# Altium PCB NaiS6202HD_0.7.PcbDoc (part 2 of 2)
Units mm, origin at the board's own origin, x right, y up, seen from the top; angles counter-clockwise.
Board outline 60 x 38 mm, 4 copper layers (Top, INT1, GND, Bottom), stack 0.965 mm thick; 148 components, 224 nets, 688 pads, 333 vias.
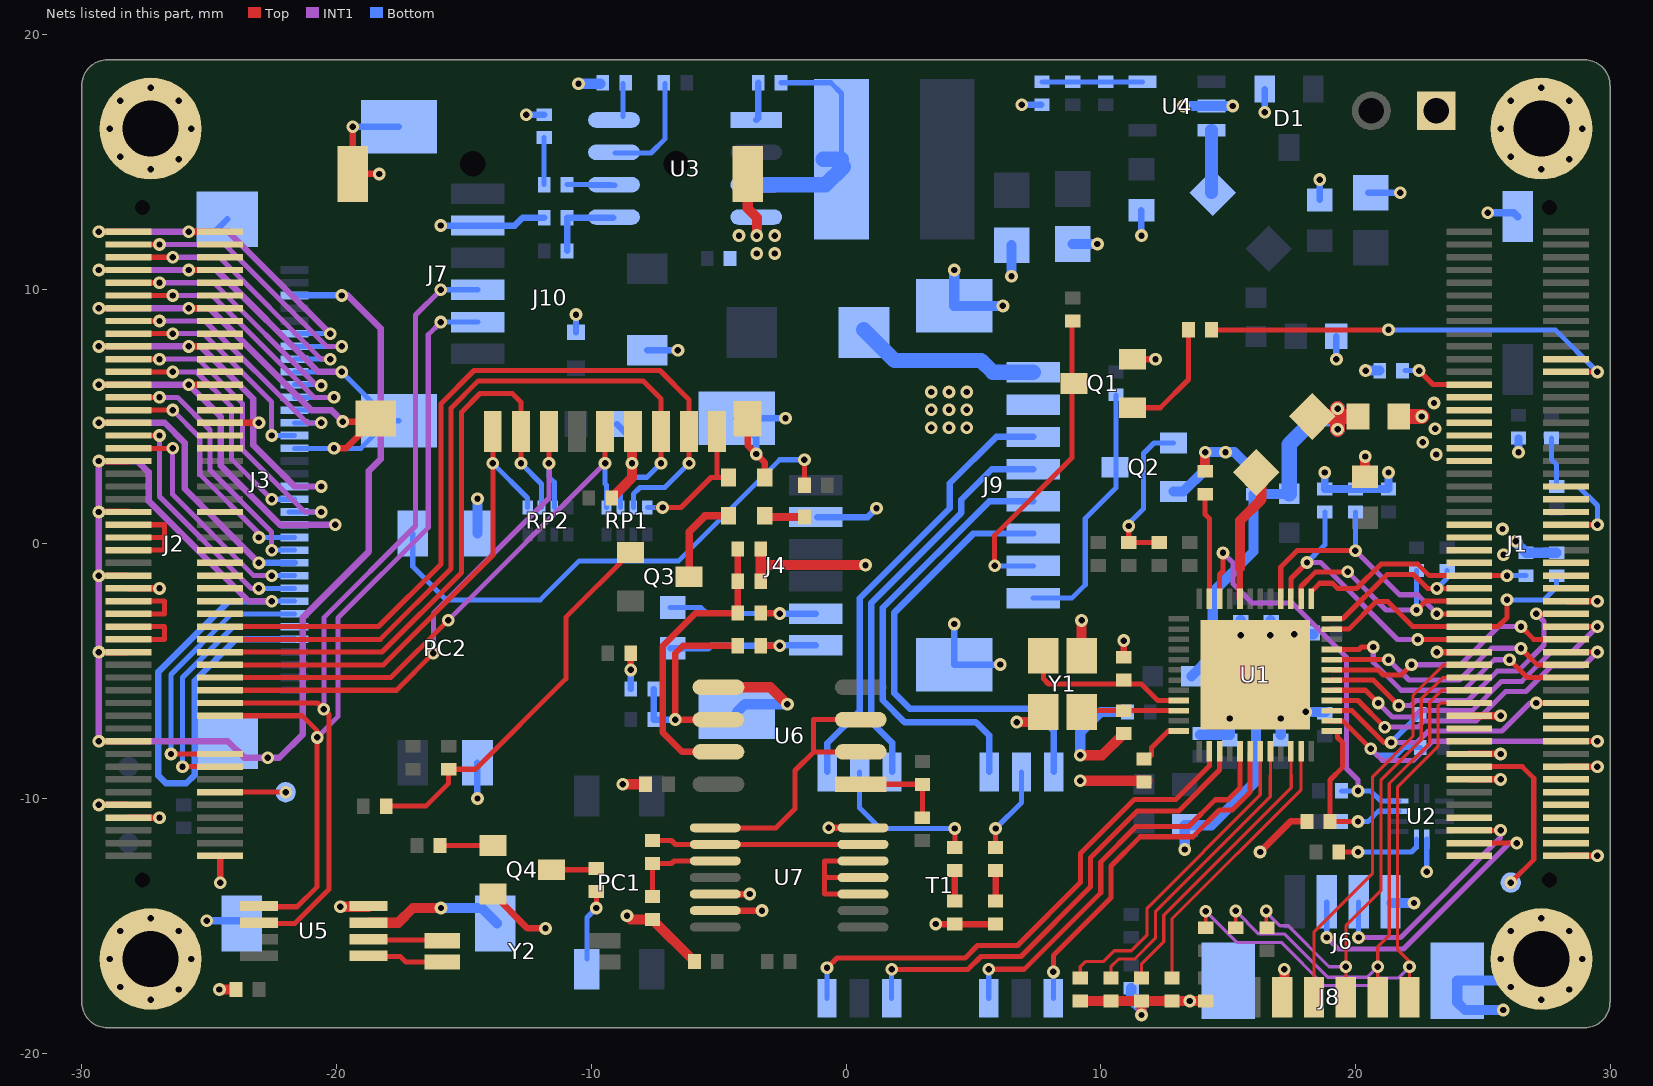
[diagram p4: the nets of this part, all layers, seen from the top]

## Via types
v1: diameter 0.5, hole 0.25, Top to Bottom, tented both sides, 189 vias
v2: diameter 0.5, hole 0.25, Top to Bottom, 144 vias

## Nets (pads, with @x,y where several pads share a name; then routed paths per layer and width w, separated by ;. In a path a pad name is that pad's centre, name@x,y a point inside that pad or via, vN(x,y) a via of type N, cw(c..) or ccw(c..) an arc to the next point about the centre after c; other vN are vias at no path point) (continued)
GND: BAT1.2 BC1.2 BC2.2 BC3.2 BC4.2 BC5.2 BC6.2 BC7.2 BC8.2 BC9.2 BC10.2 BC11.2 BC12.2 BC13.2 BC14.2 BC15.2 BC16.1 BC17.1 BC18.1 BC19.1 BC20.1 BC21.1 C1.1 C2.2 C3.1 C4.1 C5.2 C6.2 C7.2 C8.2 C9.2 C10.2 C11.2 C12.2 C14.2 C15.2 C16.2 C17.2 C18.2 C21.2 C22.2 C23.2 C24.1 C25.1 C26.1 D1.1 J1.2 J1.13 J1.16 J1.17 J1.23 J1.33 J1.42 J1.47 J1.49 J1.51 J1.53 J1.63 J1.65 J1.67 J1.69 J1.71 J1.73 J2.1 J2.8 J2.10 J2.20 J2.34 J2.44 J2.46 J2.56 J2.64 J2.69 J2.70 J2.75 J2.76 J2.81 J2.82 J2.87 J2.88 J2.93 J2.94 J2.99 J2.100 J3.5 J3.8 J3.11 J3.14 J3.17 J3.20 J3.23 J3.26 J3.29 J3.32 J3.M1 J3.M2 J4.2 J4.M1 J4.M2 J5.1 J6.4 J6.5 J6.6 J7.2 J7.M1 J7.M2 J8.2 J9.2 J9.9 J9.10 J10.6 J10.9 J10.10 J10.11 J10.12 MH1.1 MH2.1 MH3.1 MH4.1 PC2.2 PC2.3 Q1.2 Q2.2 Q4.2 R14.1 R16.1 R17.1 R18.1 R19.1 R22.1 R32.1 R33.1 R35.1 R50.1 SW1.2 TVS1.2 TVS2.2 U1.M1 U2.7 U3.4 U4.2 U5.4 U6.5 U7.7 U7.12 U7.13 Y1.2 Y1.4 | length 329
  Top w0.254: v1(-29.331,-10.25) J2.10@-28.17,-10.25 ; v1(-29.331,-7.75) J2.20@-28.17,-7.75 ; v1(-29.331,-4.25) J2.34@-28.17,-4.25 ; v1(-29.331,-1.25) J2.46@-28.17,-1.25 ; v1(-29.331,1.25) J2.56@-28.17,1.25 ; v1(-29.331,3.25) J2.64@-28.17,3.25 ; v1(-29.331,4.75) J2.70@-28.17,4.75 ; v1(-29.331,6.25) J2.76@-28.17,6.25 ; v1(-29.331,7.75) J2.82@-28.17,7.75 ; v1(-29.331,9.25) J2.88@-28.17,9.25 ; v1(-29.331,10.75) J2.94@-28.17,10.75 ; v1(-29.331,12.25) J2.100@-28.17,12.25 ; J2.8@-28.17,-10.75 v1(-26.95,-10.75) ; J2.44@-28.17,-1.75 v2(-26.95,-1.75) ; v1(-25.8,6.25) J2.75@-24.57,6.25 ; v2(-25.8,7.75) J2.81@-24.57,7.75 ; v1(-25.8,9.25) J2.87@-24.57,9.25 ; v2(-25.8,10.75) J2.93@-24.57,10.75 ; v1(-25.8,12.25) J2.99@-24.57,12.25 ; v1(-24.57,-13.305) J2.1@-24.57,-12.25 ; J2.69@-24.57,4.75 v2(-23.05,4.75) ; v1(-20.1,3.75) -19.632,3.75 J10.10@-18.583,4.799 ; v2(-19.753,4.799) J10.10@-18.583,4.799 ; J10.12@-19.37,14.527 v2(-19.37,16.37) ; J10.12@-19.363,14.52 v2(-18.32,14.52) ; J10.10@-18.462,4.92 J10.10@-18.583,4.799 ; Q4.2@-13.854,-13.749 -12.503,-15.1 v2(-11.8,-15.1) ; v2(-8.45,-4.95) BC20.1@-8.45,-4.3 ; U7.13@-5.132,-14.4 v2(-3.3,-14.4) ; U7.12@-5.132,-13.75 v2(-3.782,-13.75) ; J10.9@-3.86,4.911 -3.86,3.86 v2(-3.525,3.525) -3.19,3.19 TVS2.2@-3.19,2.6 ; v2(-0.682,-11.15) U7.7@0.668,-11.15 ; v2(3.527,-14.927) C12.2@4.273,-14.927 C11.2@5.873,-14.927 ; C3.1@10.9,-4.45 v2(10.9,-3.8) ; Q1.2@11.246,7.249 v2(12.149,7.249) ; v2(16.256,-12.098) 17.454,-10.9 C9.2@18.1,-10.9 ; v1(23.2,-4.25) J1.33@24.47,-4.25 ; J1.13@24.47,-9.25 v1(25.7,-9.25) ; J1.17@24.47,-8.25 v1(25.7,-8.25) ; J1.2@28.27,-12.25 v1(29.5,-12.25) ; J1.16@28.27,-8.75 v1(29.5,-8.75) ; J1.42@28.3,-2.25 v1(29.5,-2.25)
  Top w0.3: J1.23@24.645,-6.75 v1(25.7,-6.75)
  Top w0.4: v2(-24.6,-17.5) BC18.1@-23.95,-17.5 ; v1(-19.85,-14.25) U5.4@-18.75,-14.25 ; C22.2@-9.2,1.8 -8.4,2.6 v1(-8.4,3.161) J10.6@-8.4,4.412 ; v2(-8.761,-9.439) BC21.1@-7.869,-9.439 ; v2(-8.6,-14.6) -8.45,-14.75 C26.1@-7.6,-14.75 BC19.1@-5.95,-16.4 ; U6.5@-5.008,-5.629 -2.971,-5.629 v2(-2.3,-6.3) ; J10.11@-3.854,14.52 -3.854,13.163 -3.5,12.809 v1(-3.5,12.1) ; R50.1@-3.35,-1.469 -3.35,-0.834 ; C24.1@-3.35,-0.2 -3.35,-0.834 ; v2(0.766,-0.834) -3.35,-0.834 ; v1(6.7,-7) Y1.2@7.82,-7 ; C5.2@9.2,-17.95 C7.2@11.6,-17.95 ; v2(9.2,-8.3) 10.05,-8.3 C4.1@10.9,-7.45 ; v2@9.201,-9.299 R17.1@11.836,-9.299 ; Y1.4@9.25,-4.4 v1(9.25,-3.007) ; v2(11.6,-18.5) C7.2@11.6,-17.95 ; R18.1@14.1,2.85 v2(14.1,3.6) ; BC1.2@14.127,-17.95 v1(13.5,-17.95) C8.2@12.8,-17.95 C7.2@11.6,-17.95 ; J8.2@17.125,-18.175 J8.2@17.125,-17.8 ; J8.2@17.21,-17.715 v1(17.21,-16.698) ; BC9.2@20.381,2.627 v1(20.381,3.427)
  Top w0.6: BC15.2@21.837,5 v1(22.6,5)
  INT1 w0.254: v1(-29.331,4.75) -26.75,4.75 -25.959,3.959 -25.959,2.159 v2(-23.05,-0.75) ; v1(-29.331,6.25) v1(-25.8,6.25) -24.546,4.996 -24.546,3.071 -22.225,0.75 v1(-20.05,0.75) ; v1(-29.331,7.75) v2(-25.8,7.75) -25.33,7.75 -23.273,5.693 -23.273,3.877 -21.646,2.25 v1(-20.6,2.25) ; v1(-29.331,9.25) v1(-25.8,9.25) -24.989,9.25 -20.989,5.25 -20.204,5.25 v2(-19.753,4.799) ; v1(-29.331,10.75) v2(-25.8,10.75) -24.715,10.75 -20.715,6.75 v1(-19.8,6.75) ; v1(-29.331,12.25) v1(-25.8,12.25) -24.25,12.25 v1(-20.25,8.25) ; v2(-22.55,-2.25) -23.45,-2.25 -27.377,1.677 -27.377,2.8 -27.827,3.25 v1(-29.331,3.25) v1(-29.331,1.25) v1(-29.331,-1.25) v1(-29.331,-4.25) v1(-29.331,-7.75) -24.268,-7.75 -23.618,-8.4 v2(-22.7,-8.4) -22.249,-8.4 -21.322,-7.473 -21.322,-2.892 -18.73,-0.3 -18.73,2.866 -18.273,3.323 -18.273,8.463 -19.56,9.75 v2(-19.8,9.75)
  Bottom w0.2: v2(-22.55,-2.25) J3.8@-21.65,-2.25 ; J3.14@-21.65,0.75 v1(-20.05,0.75) ; J3.17@-21.65,2.25 v1(-20.6,2.25) ; J3.20@-21.65,3.75 v1(-20.1,3.75) -19.05,3.75 -17.97,4.83 J7.M2@-17.55,4.83 -17.88,4.83 v1(-19.8,6.75) J3.26@-21.65,6.75 ; J3.23@-21.65,5.25 -20.204,5.25 v2(-19.753,4.799) ; J3.29@-21.65,8.25 v1(-20.25,8.25) ; v1(22.8,-12.876) U2.7@22.8,-11.6
  Bottom w0.254: v1(-25.8,12.25) -24.788,12.25 J3.M2@-24.294,12.744 ; v2(-23.05,-0.75) J3.11@-21.65,-0.75 ; v2(-22.55,-2.25) -24.22,-2.25 -27,-5.03 -27,-9.1 -26.7,-9.4 -25.9,-9.4 -25.573,-9.073 -25.573,-5.377 -23.946,-3.75 J3.5@-21.65,-3.75 ; J3.32@-21.65,9.75 v2(-19.8,9.75) ; v2(-19.37,16.37) J7.M1@-17.55,16.37 ; v2(-15.905,12.495) J7.2@-14.45,12.495 -13.005,12.495 -12.7,12.8 R32.1@-11.85,12.8 ; v2(-14.468,-10) PC2.3@-14.468,-8.594 ; v2(-12.55,16.85) R33.1@-11.85,16.85 ; TVS1.2@-10.6,8.31 v2(-10.6,9) ; C23.2@-9,4.7 -8.4,4.1 v1(-8.4,3.161) ; C25.1@-8.45,-5.7 v2(-8.45,-4.95) ; C14.2@-7.8,7.6 v2(-6.6,7.6) ; v2(-3.525,3.525) -3.525,4.169 J4.M1@-4.282,4.926 v2(-2.374,4.926) ; J4.2@-1.131,1.051 0.851,1.051 v2(1.2,1.4) ; v2(4.25,-3.15) J9.10@4.25,-4.74 v2(6.06,-4.74) ; v1(6.9,17.237) R35.1@7.661,17.237 ; v2(11.6,12.1) BC16.1@11.6,13.1 ; v2(16.441,16.941) D1.1@16.441,17.854 ; BC17.1@18.6,13.5 v2(18.6,14.3) ; v2(19.252,7.248) BC4.2@19.252,8.148 ; C21.2@20.5,13.779 v2(21.763,13.779)
  Bottom w0.3: v1(-25.1,-14.8) BAT1.2@-23.843,-14.8 ; v1(18.8,2.8) R22.1@18.8,2.15 BC8.2@21.3,2.15 v1(21.3,2.8) ; v1(25.2,13) 26.221,13 SW1.2@26.378,12.843 ; v1(26.4,3.6) C2.2@26.4,4.15
  Bottom w0.4: PC2.2@-14.468,0.406 v2(-14.468,1.768) ; v1(-10.5,18.064) C18.2@-9.65,18.064 ; J4.M2@-4.282,-6.614 -3.968,-6.3 v2(-2.3,-6.3) ; v2(4.25,10.75) J9.9@4.25,9.34 v2(6.16,9.34) ; v2(6.5,10.5) C15.2@6.5,11.72 ; C16.2@8.9,11.77 v2(9.871,11.77) ; v2(9.2,-8.3) 9.2,-7.4 10,-6.6 BC14.2@11.05,-6.6 ; C10.2@11.2,-17.45 11.2,-17.9 11.6,-18.3 v2(11.6,-18.5) ; Q2.2@12.854,2.051 13.243,2.051 14.1,2.908 v2(14.1,3.6) v2(14.9,3.6) 15.25,3.6 BC11.2@16,2.85 ; v1(13.248,17.187) U4.2@14.348,17.187 v2(15.187,17.187) ; v2(13.3,-12) BC5.2@13.3,-11.051 14.349,-11.051 16.1,-9.3 16.1,-6.86 ; v1(13.5,-17.95) J6.6@14.127,-17.95 ; BC7.2@13.9,-7.499 15.068,-7.499 v1(15.068,-6.86) 16.1,-6.86 ; v1(15.5,-3.583) BC3.2@15.5,-2.999 ; v1(16.663,-3.586) BC2.2@16.663,-3.003 ; BC13.2@17.068,-7.499 v1(17.068,-6.86) 16.1,-6.86 ; v1(17.6,-3.549) BC10.2@18.35,-3.549 ; v1(18.05,-6.599) BC6.2@18.818,-6.599 ; v1(20.4,6.8) C1.1@20.95,6.8 ; J6.4@21.425,-14.1 v1(22.3,-14.1) ; v1(25.8,-18.3) 24.3,-18.3 24,-18 J6.5@24,-17.15 MH3.1@25.85,-17.15 ; v1(26.3,0.1) 26.3,0.05 R16.1@26.7,-0.35 R14.1@27.9,-0.35
  other v1: -27.3,-17.9 27.3,-17.9 -26.2,-17.5 28.4,-17.5 -28.5,-17.4 26.1,-17.4 -28.9,-16.3 -25.7,-16.3 25.7,-16.3 28.9,-16.3 -28.5,-15.2 -26.2,-15.2 26.1,-15.2 28.4,-15.2 -27.3,-14.7 27.3,-14.7 25.816,-0.427 25.773,0.584 23.17,3.505 22.643,3.989 23.127,4.516 3.342,4.56 4.042,4.56 4.742,4.56 3.342,5.26 4.042,5.26 4.742,5.26 23.084,5.527 3.342,5.96 4.042,5.96 4.742,5.96 -3.5,11.4 -2.8,11.4 -4.2,12.1 -2.8,12.1 -27.3,14.7 27.3,14.7 -26.2,15.1 28.4,15.1 -28.5,15.2 26.1,15.2 -28.9,16.3 -25.7,16.3 25.7,16.3 28.9,16.3 -28.5,17.4 -26.2,17.4 26.1,17.4 28.4,17.4 -27.3,17.9 27.3,17.9
  other v2: 9.201,-9.3
HDMI_INT: J1.24
HDMI_RSTN: J2.55
HP_INSERT_DET: J1.80
IIC_CLK: J2.25 J7.4 U5.6 | length 34.5
  Top w0.2: J2.25@-24.57,-6.25 -20.75,-6.25 v2(-20.5,-6.5) -20.3,-6.7 -20.3,-13.566 -21.634,-14.9 U5.6@-23.05,-14.9
  INT1 w0.2: v2(-20.5,-6.5) -20.5,-2.9 -16.9,0.7 -16.9,8.98 v2(-15.905,9.975)
  Bottom w0.2: v2(-15.905,9.975) J7.4@-14.45,9.975
IIC_SDA: J2.23 J7.5 U5.5 | length 32.6
  Top w0.2: J2.23@-24.57,-6.75 -21.35,-6.75 -20.764,-7.336 v2(-20.764,-7.6) -20.764,-13.464 -21.55,-14.25 U5.5@-23.05,-14.25
  INT1 w0.2: v2(-20.764,-7.6) -19.95,-6.786 -19.95,-2.916 -16.4,0.634 -16.4,8.21 v2(-15.905,8.705)
  Bottom w0.2: v2(-15.905,8.705) J7.5@-14.45,8.705
INT_N: R21.1 U1.34 U2.12 | length 16.7
  Top w0.2: U1.34@14.668,-2.149 14.668,-1.2 14.8,-1.068 v2(14.8,-0.357)
  INT1 w0.2: v2(14.8,-0.357) 15.2,-0.757 15.2,-1.573 15.95,-2.323 17.523,-2.323 19.65,-4.45 19.65,-8.818 20.1,-9.268 v2(20.1,-9.7)
  Bottom w0.2: R21.1@19.45,-9.7 v2(20.1,-9.7) 20.6,-9.7 21,-10.1 U2.12@21.7,-10.1
KEY_1: J1.54 R5.1 R8.1 | length 5.9
  Top w0.2: J1.54@28.27,0.75 v1(29.5,0.75)
  Bottom w0.2: R8.1@27.7,4.15 27.7,3.3 27.9,3.1 R5.1@27.9,2.25 28.75,2.25 29.5,1.5 v1(29.5,0.75)
KEY_2: J1.56
LCD_EN: J1.46
LCD_RST: J1.44
LED0: J9.7 Q1.3 R1.1 | length 12.4
  Top w0.2: v2(5.835,-0.865) 5.835,0.335 8.865,3.365 R1.1@8.865,8.75
  Bottom w0.2: v2(5.835,-0.865) J9.7@7.35,-0.865
LED1: J9.8 Q2.3 R6.1 | length 10.2
  Bottom w0.2: J9.8@7.35,-2.135 8.865,-2.135 9.392,-1.608 9.392,0.992 10.6,2.2 R6.1@10.6,5.85
LED_AD0: R18.2 U1.35 | length 4.2
  Top w0.2: R18.2@14.1,1.95 14.1,1.156 14.268,0.988 U1.35@14.268,-2.149
LED_GN: Q2.1 R4.1 R7.1 | length 6.3
  Top w0.2: v2(11.1,0.7) R7.1@11.1,0.05 R4.1@12.3,0.05
  Bottom w0.2: v2(11.1,0.7) 11.1,0.8 11.676,1.376 11.676,3.543 12.092,3.959 Q2.1@12.854,3.959
LED_MLINK: Q1.1 R3.1 | length 4.6
  Top w0.2: Q1.1@11.246,5.341 12.341,5.341 13.45,6.45 R3.1@13.45,8.4
LX_1V2: BC11.1 BC15.1 FB3.1 FB4.1 L1.1 | length 17.1
  Top w0.6: L1.1@18.4,5 BC15.1@20.1,5 ; v1(19.3,4.5) v1(19.3,5.3)
  Bottom w0.4: FB4.1@13.562,-5.2 14.4,-4.362 14.4,-1.9 16,-0.3 BC11.1@16,1.95 FB3.1@17.388,1.95
  Bottom w0.6: FB3.1@17.4,1.962 17.4,3.9 18.4,4.9 19.3,4.9 ; v1(19.3,4.5) v1(19.3,5.3)
MDI0N: T1.6 U1.3 | length 18.7
  Top w0.2: v2(1.794,-16.706) 4.794,-16.706 5.3,-16.2 6.866,-16.2 9.6,-13.466 9.6,-12.322 11.433,-10.489 13.062,-10.489 14.668,-8.883 U1.3@14.668,-8.149
  Bottom w0.2: T1.6@1.794,-17.845 v2(1.794,-16.706)
MDI0P: T1.8 U1.2 | length 20.7
  Top w0.2: v2(-0.746,-16.646) -0.356,-16.256 4.678,-16.256 5.167,-15.767 6.733,-15.767 9.2,-13.3 9.2,-12.156 11.322,-10.034 12.95,-10.034 14.268,-8.717 U1.2@14.268,-8.149
  Bottom w0.2: T1.8@-0.746,-17.845 v2(-0.746,-16.646)
MDI1N: T1.1 U1.6 | length 14.4
  Top w0.2: v2(8.142,-16.806) 8.142,-16.158 10.4,-13.9 10.4,-12.653 11.553,-11.5 13.615,-11.5 14.666,-10.449 15.164,-10.449 15.868,-9.746 U1.6@15.868,-8.149
  Bottom w0.2: T1.1@8.142,-17.845 v2(8.142,-16.806)
MDI1P: T1.3 U1.5 | length 16.1
  Top w0.2: v2(5.604,-16.704) 6.996,-16.704 10,-13.7 10,-12.487 11.387,-11.1 13.449,-11.1 14.5,-10.049 14.999,-10.049 15.468,-9.58 U1.5@15.468,-8.149
  Bottom w0.2: T1.3@5.604,-17.845 v2(5.604,-16.704)
MDI2N: C6.1 U1.8 | length 11.9
  Top w0.127: C6.1@10.4,-17.05 10.4,-16.6 10.7,-16.3 11.338,-16.3 12.146,-15.492 12.146,-14.444 16.654,-9.936 16.654,-9.097 16.668,-9.083 U1.8@16.668,-8.149
MDI2P: C5.1 U1.7 | length 12.6
  Top w0.127: C5.1@9.2,-17.05 9.2,-16.6 9.4,-16.4 10.1,-16.4 10.527,-15.973 11.202,-15.973 11.819,-15.356 11.819,-14.309 16.268,-9.86 U1.7@16.268,-8.149
MDI3N: C8.1 U1.11 | length 11
  Top w0.127: C8.1@12.8,-17.05 12.8,-14.715 17.868,-9.647 U1.11@17.868,-8.149
MDI3P: C7.1 U1.10 | length 11
  Top w0.127: C7.1@11.6,-17.05 11.6,-16.5 12.473,-15.627 12.473,-14.58 17.481,-9.571 17.481,-9.083 17.468,-9.07 U1.10@17.468,-8.49
MIC_DATA_PDM: J1.1
MIC_SCLK_PDM: J1.7
MIPI_CSI_CLK0_DN: J2.74 J3.12 | length 10.4
  Top w0.2: J2.74@-28.17,5.75 v1(-26.95,5.75)
  INT1 w0.2: v1(-26.95,5.75) -26.25,5.75 -24.973,4.473 -24.973,2.895 -22.55,0.472 v2(-22.55,-0.25)
  Bottom w0.2: v2(-22.55,-0.25) J3.12@-21.65,-0.25
MIPI_CSI_CLK0_DP: J2.72 J3.13 | length 9.5
  Top w0.2: J2.72@-28.17,5.25 v1(-26.436,5.25)
  INT1 w0.2: v1(-26.436,5.25) -26.436,5.24 -25.373,4.177 -25.373,2.729 -23.05,0.406 v2(-23.05,0.25)
  Bottom w0.2: v2(-23.05,0.25) J3.13@-21.65,0.25
MIPI_CSI_CLK1_DN: J2.90 J3.24 | length 11.3
  Top w0.2: J2.90@-28.17,9.75 v1(-26.436,9.75)
  INT1 w0.2: v1(-26.436,9.75) -24.885,9.75 -20.885,5.75 v1(-20.102,5.75)
  Bottom w0.2: J3.24@-21.65,5.75 v1(-20.102,5.75)
MIPI_CSI_CLK1_DP: J2.92 J3.25 | length 10.3
  Top w0.2: J2.92@-28.17,10.25 v1(-26.95,10.25)
  INT1 w0.2: v1(-26.95,10.25) -24.819,10.25 -20.785,6.216 v1(-20.598,6.216)
  Bottom w0.2: J3.25@-21.65,6.25 v1@-20.6,6.25
MIPI_CSI_D0_N: J2.68 J3.9 | length 10.4
  Top w0.2: J2.68@-28.17,4.25 v1(-26.95,4.25)
  INT1 w0.2: v1(-26.95,4.25) -26.95,1.854 -23.346,-1.75 v2(-23.05,-1.75)
  Bottom w0.2: v2(-23.05,-1.75) J3.9@-21.65,-1.75
MIPI_CSI_D0_P: J2.66 J3.10 | length 9.7
  Top w0.2: J2.66@-28.17,3.75 v1(-26.436,3.75)
  INT1 w0.2: v1(-26.436,3.75) -26.436,1.936 -23.25,-1.25 v2(-22.55,-1.25)
  Bottom w0.2: v2(-22.55,-1.25) J3.10@-21.65,-1.25
MIPI_CSI_D1_N: J2.80 J3.15 | length 12.4
  Top w0.2: J2.80@-28.17,7.25 v1(-26.95,7.25)
  INT1 w0.2: v1(-26.95,7.25) -25.434,7.25 -23.7,5.516 -23.7,3.7 -21.25,1.25 v1(-20.6,1.25)
  Bottom w0.2: J3.15@-21.87,1.25 v1(-20.6,1.25)
MIPI_CSI_D1_P: J2.78 J3.16 | length 9.8
  Top w0.2: J2.78@-28.17,6.75 v1(-26.436,6.75)
  INT1 w0.2: v1(-26.436,6.75) -25.5,6.75 -24.119,5.369 -24.119,3.319 v1(-22.55,1.75)
  Bottom w0.2: v1(-22.55,1.75) J3.16@-21.65,1.75
MIPI_CSI_D2_N: J2.84 J3.21 | length 9
  Top w0.2: J2.84@-28.17,8.25 v1(-26.436,8.25)
  INT1 w0.2: v1(-26.436,8.25) -25.227,8.25 -22.55,5.573 v1(-22.55,4.25)
  Bottom w0.2: v1(-22.55,4.25) J3.21@-21.65,4.25
MIPI_CSI_D2_P: J2.86 J3.22 | length 10.3
  Top w0.2: J2.86@-28.17,8.75 v1(-26.95,8.75)
  INT1 w0.2: v1(-26.95,8.75) -25.161,8.75 -21.161,4.75 v1(-20.598,4.75)
  Bottom w0.2: J3.22@-21.65,4.75 v1(-20.598,4.75)
MIPI_CSI_D3_N: J2.96 J3.27 | length 11
  Top w0.2: J2.96@-28.17,11.25 v1(-26.436,11.25)
  INT1 w0.2: v1(-26.436,11.25) -24.6,11.25 -20.6,7.25 v1(-20.25,7.25)
  Bottom w0.2: J3.27@-21.65,7.25 v1(-20.25,7.25)
MIPI_CSI_D3_P: J2.98 J3.28 | length 11.9
  Top w0.2: J2.98@-28.17,11.75 v1(-26.95,11.75)
  INT1 w0.2: v1(-26.95,11.75) -24.386,11.75 -20.386,7.75 v1(-19.8,7.75)
  Bottom w0.2: J3.28@-21.65,7.75 v1(-19.8,7.75)
MIPI_CSI_I2C_SCL: J2.17 J3.7 | length 10.9
  Top w0.2: v1(-26.5,-8.25) J2.17@-24.57,-8.25
  Bottom w0.2: v1(-26.5,-8.25) -26.5,-5.134 -24.116,-2.75 J3.7@-21.65,-2.75
MIPI_CSI_I2C_SDA: J2.15 J3.6 | length 10.4
  Top w0.2: v1@-26,-8.75 J2.15@-24.35,-8.75
  Bottom w0.2: v1(-26.05,-8.75) -26.05,-5.25 -24.05,-3.25 J3.6@-21.65,-3.25
MIPI_DSI_CLKN: J2.83
MIPI_DSI_CLKP: J2.85
MIPI_DSI_D0N: J2.71
MIPI_DSI_D0P: J2.73
MIPI_DSI_D1N: J2.77
MIPI_DSI_D1P: J2.79
MIPI_DSI_D2N: J2.89
MIPI_DSI_D2P: J2.91
MIPI_DSI_D3N: J2.95
MIPI_DSI_D3P: J2.97
MIPI_SWITCH_SEL: J1.22
MMC1_CLK: J1.4
MMC1_CMD: J1.6
MMC1_D0: J1.14
MMC1_D1: J1.12
MMC1_D2: J1.10
MMC1_D3: J1.8
N21617464: D2.1 J9.1 | length 7.3
  Bottom w0.6: D2.1@0.7,8.4 1.9,7.2 5.3,7.2 5.765,6.735 J9.1@7.35,6.735
N21624957: C11.1 R28.1 | length 1.2
  Top w0.254: C11.1@5.873,-14.027 R28.1@5.873,-12.827
N21624998: C12.1 R29.1 | length 1.2
  Top w0.254: C12.1@4.273,-14.027 R29.1@4.273,-12.827
N21759423: L3.1 U4.3 | length 2.5
  Bottom w0.5: L3.1@14.348,13.779 U4.3@14.348,16.237
N21759480: C20.2 R34.1 R35.2 U4.5 | length 3.9
  Bottom w0.2: R35.2@7.698,18.137 U4.5@11.648,18.137
N21768552: L1.2 U1.32 | length 5.3
  Top w0.254: U1.32@15.468,-2.149 15.468,-0.946
  Top w0.4: 15.468,-0.946 15.468,0.905 16.3,1.737 L1.2@16.3,2.8
N21768580: R17.2 U1.48 | length 1.6
  Top w0.2: R17.2@12,-8.31 12,-8 12.641,-7.359 U1.48@13.068,-7.359
N21781792: U5.1 Y2.1 | length 3
  Top w0.2: U5.1@-18.75,-16.2 -17.5,-16.2 -17.28,-16.42 Y2.1@-15.85,-16.42
N21781837: U5.2 Y2.4 | length 2.9
  Top w0.2: U5.2@-18.75,-15.55 Y2.4@-15.85,-15.55
N21781846: BAT1.1 U5.3 | length 5.5
  Top w0.4: U5.3@-18.75,-14.875 -17.575,-14.875 -17,-14.3 v1(-15.9,-14.3)
  Bottom w0.4: v1(-15.9,-14.3) -14.3,-14.3 BAT1.1@-13.7,-14.9
N21825549: C13.2 L2.1 U3.3 | length 9.6
  Bottom w0.2: C13.2@-2.55,18.1 -0.6,18.1 -0.175,17.675 L2.1@-0.175,15.1
  Bottom w0.6: U3.3@-3.52,14.099 -0.801,14.099 L2.1@-0.1,14.8 ; L2.1@-0.9,15.1 L2.1@-0.175,15.1
N21825600: R30.2 U3.7 | length 4.4
  Bottom w0.2: U3.7@-9.07,15.346 -7.654,15.346 -7.1,15.9 R30.2@-7.1,18.064
N21825631: R31.2 R32.2 U3.5 | length 3.1
  Bottom w0.254: R31.2@-10.95,11.5 R32.2@-10.95,12.8 U3.5@-9.137,12.8
N21825652: C18.1 U3.8 | length 1.3
  Bottom w0.2: U3.8@-8.75,16.774 C18.1@-8.75,18.064
N21825662: C19.1 U3.6 | length 2.7
  Bottom w0.2: C19.1@-10.95,14.1 U3.6@-9.208,14.099 ; U3.6@-10.024,14.076 U3.6@-9.07,14.076
N21825703: C19.2 R33.2 | length 1.9
  Bottom w0.2: C19.2@-11.85,14.1 R33.2@-11.85,15.95
N21833189: R23.1 U2.8 | length 3.4
  Top w0.2: R23.1@19.35,-12.1 v2@20,-12.1
  Bottom w0.2: v2@20,-12.1 v2(20.1,-12.1) 22.2,-12.1 22.4,-11.9 U2.8@22.4,-11.6
N21904475: Q3.1 R36.2 R37.2 | length 15.5
  Top w0.2: R37.2@-18.05,-10.3 -16.5,-10.3 -15.6,-9.4 R36.2@-15.6,-8.85 -14.55,-8.85 -11,-5.3 -11,-2.887 Q3.1@-8.454,-0.341
N21904513: D3.1 Q3.3 | length 3.6
  Top w0.3: Q3.3@-6.161,-1.295 -6.161,0.474 -5.534,1.1 D3.1@-4.61,1.1
N21904537: Q4.3 R38.2 | length 1.7
  Top w0.2: Q4.3@-11.561,-12.795 R38.2@-9.845,-12.795
N21904541: PC1.2 R38.1 | length 2.8
  Top w0.2: v2(-9.8,-14.3) R38.1@-9.8,-13.65
  Bottom w0.2: PC1.2@-10.17,-16.3 -10.17,-14.67 v2(-9.8,-14.3)
N21904592: D3.2 R41.2 | length 1.6
  Top w0.3: D3.2@-3.19,1.051 R41.2@-1.632,1.051
N21904643: PC2.1 R42.2 | length 20.5
  Top w0.2: R42.2@-1.632,2.301 v2(-1.632,3.3)
  Bottom w0.2: PC2.1@-17.008,0.406 -17.008,-0.892 -15.7,-2.2 -12,-2.2 -10.469,-0.669 -6.569,-0.669 -2.6,3.3 v2(-1.632,3.3)
N21904713: R44.1 R45.2 U6.1 | length 3.6
  Top w0.2: U6.1@0.58,-9.439 2.989,-9.439 R44.1@2.998,-9.448 ; R45.2@2.998,-10.752 R44.1@2.998,-9.552
N21904745: C25.2 R46.1 R49.1 U6.6 | length 8.9
  Top w0.254: U6.6@-5.009,-6.9 v2(-6.7,-6.9) -6.7,-4.3 -6.4,-4 R49.1@-4.25,-4 R49.1@-4.219,-4
  Bottom w0.254: C25.2@-7.55,-5.7 R46.1@-7.55,-6.9 v2(-6.7,-6.9)
N21904768: C24.2 R47.1 R50.2 U6.7 | length 12
  Top w0.254: U6.7@-5.008,-8.169 -6.431,-8.169 -7.2,-7.4 -7.2,-4.019 -5.9,-2.719 R47.1@-4.25,-2.719 C24.2@-4.25,-0.1
N21911975: U7.3 U7.4 U7.5 | length 5.9
  Top w0.2: U7.3@0.668,-13.75 -0.85,-13.75 -0.85,-13 ; U7.4@0.668,-13.1 -0.75,-13.1 -0.85,-13 ; U7.5@0.668,-12.45 -0.85,-12.45 -0.85,-13
N21911995: R52.2 U7.6 U7.9 | length 8.3
  Top w0.2: R52.2@-7.6,-11.65 -6.85,-11.65 -6.694,-11.806 -5.138,-11.806 U7.9@-5.132,-11.8 U7.6@0.668,-11.8
N21912035: C26.2 R52.1 U7.10 | length 4
  Top w0.2: C26.2@-7.6,-14 R52.1@-7.6,-12.55 -6.85,-12.55 -6.75,-12.45 U7.10@-5.132,-12.45
N218255250: C13.1 U3.1 | length 1.5
  Bottom w0.254: U3.1@-3.52,16.639 -3.45,16.709 C13.1@-3.45,18.1
N219045651: Q4.1 R39.2 | length 2.1
  Top w0.2: R39.2@-15.941,-11.841 Q4.1@-13.854,-11.841
POE_LINE_1_2+: R28.2 T1.15 | length 3.4
  Top w0.2: R28.2@5.873,-11.927 v2(5.873,-11.177)
  Bottom w0.2: v2(5.873,-11.177) 6.888,-10.162 T1.15@6.888,-8.955
POE_LINE_3_6-: R29.2 T1.10 | length 6.2
  Top w0.2: R29.2@4.273,-11.927 v2(4.273,-11.177)
  Bottom w0.2: T1.10@0.538,-8.955 0.538,-10.37 1.344,-11.177 v2(4.273,-11.177)
QSPI_NAND_CLK: J2.41
QSPI_NAND_CS: J2.39
QSPI_NAND_IO0: J2.45
QSPI_NAND_IO1: J2.43
QSPI_NAND_IO2: J2.49
QSPI_NAND_IO3: J2.47
RESET_N: C9.1 R20.2 U1.13 U2.11 | length 7.6
  Top w0.2: U1.13@19.068,-7.349 19.3,-7.349 19.3,-7.6 19.5,-7.8 19.5,-8.768 19,-9.268 C9.1@19,-10.9 v2(20.1,-10.9)
  Bottom w0.2: R20.2@19.45,-10.9 v2(20.1,-10.9) 20.5,-10.9 20.9,-10.5 U2.11@21.7,-10.5
RGMII_MDC: J1.20 R12.2 U1.14 | length 14.8
  Top w0.2: U1.14@19.068,-6.949 19.5,-6.949 v1(20.6,-8.049) ; v1@20.6,-8.1 v1@20.6,-8.051 ; J1.20@28.27,-7.75 v1(29.5,-7.75)
  INT1 w0.2: v1(20.6,-8.049) 21.05,-8.499 22.287,-8.499 23.037,-7.75 v1(29.5,-7.75)
  Bottom w0.2: v1(20.6,-8.049) 20.851,-8.3 21.611,-8.3 21.911,-8 R12.2@22.55,-8
RGMII_MDIO: J1.26 R13.2 U1.15 | length 12
  Top w0.2: U1.15@19.068,-6.549 19.864,-6.549 21.114,-7.8 v1(21.4,-7.8) ; v1(27.1,-6.25) J1.26@28.27,-6.25
  INT1 w0.2: v1(21.4,-7.8) 22.421,-7.8 22.871,-7.35 25.75,-7.35 26.85,-6.25 v1(27.1,-6.25)
  Bottom w0.2: v1(21.4,-7.8) 22.5,-6.7 R13.2@22.55,-6.7
RGMII_RXC: J1.39 R19.2 U1.28 | length 11.5
  Top w0.2: U1.28@17.068,-2.149 17.068,-0.907 17.707,-0.268 v2(20,-0.268) ; v1(23.2,-2.75) J1.39@24.47,-2.75
  INT1 w0.2: v2(20,-0.268) 21.732,-2 22.45,-2 v1(23.2,-2.75)
  Bottom w0.2: v2(20,-0.268) R19.2@20,1.25
RGMII_RXCTL: J1.35 R22.2 U1.27 | length 11.6
  Top w0.2: U1.27@17.468,-2.149 17.468,-1.366 v2(18.1,-0.734) ; v1(22.449,-3.755) J1.35@24.47,-3.755
  INT1 w0.2: v2(18.1,-0.734) 18.634,-0.734 21.655,-3.755 v1(22.449,-3.755)
  Bottom w0.2: v2(18.1,-0.734) 18.798,-0.036 R22.2@18.798,1.248
RGMII_RXD0: J1.41 R24.1 U1.26 | length 9.6
  Top w0.2: U1.26@17.868,-2.149 17.868,-1.672 18.44,-1.1 v2(19.7,-1.1) ; v2(22.4,-2.6) 22.75,-2.25 J1.41@24.47,-2.25
  INT1 w0.2: v2(19.7,-1.1) 21.2,-2.6 v2(22.4,-2.6)
  Bottom w0.2: v2(22.4,-2.6) R24.1@22.4,-1.05
RGMII_RXD1: J1.45 R16.2 U1.25 | length 9.5
  Top w0.2: U1.25@18.268,-2.149 18.268,-1.882 18.6,-1.549 19.1,-1.549 19.304,-1.754 20.046,-1.754 21,-0.8 22.451,-0.8 22.901,-1.25 J1.45@24.47,-1.25 v1(25.95,-1.25)
  Bottom w0.2: v1(25.95,-1.25) R16.2@26.7,-1.25
RGMII_RXD2: J1.43 R15.2 U1.24 | length 7.2
  Top w0.2: U1.24@19.068,-2.949 19.078,-2.939 19.511,-2.939 19.512,-2.939 19.512,-2.934 21.246,-1.2 22.285,-1.2 22.835,-1.75 v1(23.2,-1.75) J1.43@23.6,-1.75 ; J1.43@23.65,-1.75 J1.43@24.47,-1.75
  Bottom w0.2: v1(23.2,-1.75) 23.6,-1.35 R15.2@23.6,-1.05
RGMII_RXD3: J1.37 R14.2 U1.23 | length 11.2
  Top w0.2: U1.23@19.068,-3.349 19.734,-3.349 20.814,-2.269 21.269,-2.269 22.25,-3.25 J1.37@24.47,-3.25 25.6,-3.25 25.95,-2.9 v1(25.95,-2.2)
  Bottom w0.2: v1(25.95,-2.2) 27.4,-2.2 27.9,-1.7 R14.2@27.9,-1.25
RGMII_TXC: J1.30 U1.21 | length 11.1
  Top w0.2: U1.21@19.068,-4.149 20.136,-4.149 20.236,-4.049 v1(20.7,-4.049) ; v1(26.05,-4.55) 26.75,-5.25 J1.30@28.27,-5.25
  INT1 w0.2: v1(20.7,-4.049) 20.7,-4.649 21.801,-5.75 24.253,-5.75 25.453,-4.55 v1(26.05,-4.55)
RGMII_TXCTL: J1.32 U1.20 | length 10.4
  Top w0.2: U1.20@19.068,-4.549 v1(21.3,-4.549) ; v1(26.5,-4.107) 27.143,-4.75 J1.32@28.27,-4.75
  INT1 w0.2: v1(21.3,-4.549) 22.1,-5.349 24.088,-5.349 25.337,-4.1 v1@26.493,-4.1 ; v1(26.5,-4.107) v1@26.493,-4.1 ; v1@26.6,-4.1 v1@26.493,-4.1
RGMII_TXD0: J1.36 U1.19 | length 10.3
  Top w0.2: U1.19@19.068,-4.949 20.9,-4.949 21.1,-5.149 21.8,-5.149 v1(22.2,-4.749) ; v1(26.5,-3.25) 27,-3.75 J1.36@28.27,-3.75
  INT1 w0.2: v1(22.2,-4.749) 24.122,-4.749 25.622,-3.25 v1(26.5,-3.25)
RGMII_TXD1: J1.40 U1.18 | length 12.2
  Top w0.2: U1.18@19.068,-5.349 20.7,-5.349 v1(21.7,-6.349) ; v1(27.1,-2.75) J1.40@28.27,-2.75
  INT1 w0.2: v1(21.7,-6.349) 22.174,-6.349 22.374,-6.15 24.419,-6.15 25.569,-5 26.369,-5 27.4,-3.969 27.4,-3.05 v1(27.1,-2.75)
RGMII_TXD2: J1.38 U1.17 | length 13.6
  Top w0.2: U1.17@19.068,-5.749 20.4,-5.749 v1(20.9,-6.249) ; J1.38@28.27,-3.25 v1(29.5,-3.25)
  INT1 w0.2: v1(20.9,-6.249) 21.45,-6.799 22.29,-6.799 22.539,-6.55 24.584,-6.55 25.734,-5.4 26.534,-5.4 27.684,-4.25 28.5,-4.25 v1(29.5,-3.25)
RGMII_TXD3: J1.34 U1.16 | length 13.3
  Top w0.2: U1.16@19.068,-6.149 20.1,-6.149 v1(21.15,-7.199) ; J1.34@28.27,-4.25 v1(29.5,-4.25)
  INT1 w0.2: v1(21.15,-7.199) 22.456,-7.199 22.705,-6.95 24.75,-6.95 25.9,-5.8 26.7,-5.8 27.7,-4.8 28.95,-4.8 v1(29.5,-4.25)
RTS_485: U6.2 U6.3 U7.8 | length 10.9
  Top w0.2: U7.8@-5.132,-11.15 -2.75,-11.15 -2,-10.4 -2,-8.9 -1.269,-8.169 ; U6.2@0.58,-8.169 -1.269,-8.169 ; U6.3@0.58,-6.899 -1.269,-6.899 -1.269,-8.169
RXD_DEBUG: J1.5 J6.3 | length 10.1
  Top w0.2: J1.5@24.47,-11.25 v1(25.7,-11.25)
  INT1 w0.2: v1(20.125,-15.458) 21.776,-15.458 25.7,-11.534 v1(25.7,-11.25)
  Bottom w0.2: v1(20.125,-15.458) J6.3@20.125,-14.058
SD2_CLK: J2.29 J10.5 RP1.7 | length 21.6
  Top w0.2: J2.29@-24.57,-5.25 -17.87,-5.25 v2(-15.62,-3) ; v2@-9.459,3.202 J10.5@-9.459,4.412
  INT1 w0.2: v2(-15.62,-3) v2(-9.459,3.161)
  Bottom w0.2: v2(-9.459,3.161) -9.459,2.359 -9.4,2.3 RP1.7@-9.4,1.425
SD2_CMD: J2.27 J10.3 RP2.3 | length 23.1
  Top w0.2: J2.27@-24.57,-5.761 -22.9,-5.761 ; J2.27@-24.57,-5.75 -17.65,-5.75 v2(-16.2,-4.3) ; v2(-11.665,3.161) J10.3@-11.665,4.412
  INT1 w0.2: v2(-16.2,-4.3) -16.2,-2.734 -11.665,1.801 v2(-11.665,3.161) v2@-11.665,3.2
  Bottom w0.2: v2@-11.65,3.146 -11.65,2.616 -11.45,2.416 RP2.3@-11.45,1.425
SD2_DATA0: J2.35 J10.7 RP1.5 | length 30.7
  Top w0.2: J2.35@-24.57,-3.75 -18.284,-3.75 -15.5,-0.966 -15.5,5.334 -14.434,6.4 -7.966,6.4 -7.266,5.7 J10.7@-7.266,4.412 v2(-7.266,3.161)
  Bottom w0.2: RP1.5@-8.85,1.425 -8.85,2.018 -8.255,2.613 -7.816,2.613 -7.815,2.615 ; -7.813,2.613 v2(-7.266,3.161) ; v2@-7.267,3.162 v2@-7.266,3.164
SD2_DATA1: J2.37 J10.8 RP1.3 | length 32.5
  Top w0.2: J2.37@-24.57,-3.25 -18.35,-3.25 -15.9,-0.8 -15.9,5.5 -14.6,6.8 -7.3,6.8 -6.161,5.661 J10.8@-6.161,4.412 v2@-6.161,3.164
  Bottom w0.2: RP1.3@-8.35,1.425 -8.35,1.953 -8.09,2.213 -7.111,2.213 v2@-6.164,3.161 ; v2(-6.161,3.161) v2@-6.164,3.161 ; v2@-6.161,3.164 v2@-6.164,3.161
SD2_DATA2: J2.31 J10.1 RP2.7 | length 19.7
  Top w0.2: J2.31@-24.57,-4.75 -18.153,-4.75 -13.866,-0.463 v2(-13.866,3.161) J10.1@-13.866,4.412
  Bottom w0.2: v2(-13.866,3.161) -12.5,1.795 RP2.7@-12.5,1.425 ; v2@-13.866,3.2 v2@-13.846,3.18
SD2_DATA3: J2.33 J10.2 RP2.5 | length 24.3
  Top w0.2: J2.33@-24.57,-4.25 -18.219,-4.25 -15.1,-1.131 -15.1,5.169 -14.369,5.9 -13.1,5.9 -12.761,5.561 J10.2@-12.761,4.412 v2(-12.761,3.161)
  Bottom w0.2: v2(-12.761,3.161) -11.95,2.35 RP2.5@-11.95,1.425
SD2_DET: J10.CD RP1.1 TVS2.1 | length 5.8
  Top w0.2: v2@-7.425,1.425 v2(-7.2,1.425) -6.475,1.425 -5.3,2.6 -5.065,2.6 ; J10.CD@-5.065,4.412 -5.065,2.6 ; TVS2.1@-4.51,2.6 -5.065,2.6
  Bottom w0.2: RP1.1@-7.8,1.425 v2(-7.2,1.425)
SYS_LED: J1.78 R3.2 | length 17.2
  Top w0.2: R3.2@14.35,8.4 v2(21.3,8.4) ; J1.78@28.095,6.75 J1.78@28.27,6.75 v1(29.5,6.75)
  Bottom w0.2: v2(21.3,8.4) 27.85,8.4 v1(29.5,6.75)
SYS_RST: C1.2 J1.75 | length 2.9
  Top w0.2: v1(22.5,6.8) 23.05,6.25 J1.75@24.47,6.25 J1.75@24.645,6.25
  Bottom w0.2: C1.2@21.95,6.8 v1(22.5,6.8)
TCK_1V8: J1.27 J8.5 R11.1 | length 21.6
  Top w0.127: R11.1@15.3,-15.073 v2(15.3,-14.412) ; J8.5@20.875,-17.7 v1(20.875,-16.6) 20.875,-15.825 21.327,-15.373 21.327,-9.411 22.913,-7.824 22.913,-6.224 23.388,-5.75 J1.27@24.47,-5.75
  INT1 w0.127: v2(15.3,-14.412) 16.211,-15.323 17.223,-15.323 18.913,-17.013 20.462,-17.013 v1(20.875,-16.6)
TDI_1V8: J1.25 J8.6 R10.1 | length 23.7
  Top w0.127: R10.1@14.127,-15.073 v2(14.127,-14.423) ; J8.6@22.125,-17.7 v1(22.125,-16.6) 22.125,-16.4 21.654,-15.929 21.654,-9.546 23.24,-7.96 23.24,-6.359 23.35,-6.25 J1.25@24.47,-6.25
  INT1 w0.127: v2@14.11,-14.412 15.348,-15.65 17.088,-15.65 18.778,-17.34 20.597,-17.34 20.887,-17.05 21.675,-17.05 v1(22.125,-16.6)
TDO_1V8: J1.31 J8.3 | length 16.2
  Top w0.127: J8.3@18.375,-17.7 18.375,-15.225 20.673,-12.927 20.673,-9.14 22.259,-7.553 22.259,-5.953 23.463,-4.75 J1.31@24.47,-4.75 J1.31@24.645,-4.75
TMS_1V8: J1.29 J8.4 R9.1 | length 19.7
  Top w0.127: R9.1@16.5,-15.062 v2(16.5,-14.412) ; J8.4@19.625,-17.7 v1(19.625,-16.6) 19.625,-15 21,-13.625 21,-9.275 22.586,-7.689 22.586,-6.089 23.425,-5.25 J1.29@24.47,-5.25
  INT1 w0.127: v2@16.5,-14.461 17.035,-14.996 17.358,-14.996 18.962,-16.6 v1(19.625,-16.6)
TOUCH_I2C_SCL: J2.65
TOUCH_I2C_SDA: J2.67
TOUCH_INT: J1.58
TOUCH_RST: J1.48
TPRXN_CON: J9.4 T1.11 | length 15.8
  Bottom w0.254: T1.11@1.808,-8.955 1.808,-7.808 0.992,-6.992 0.992,-2.324 4.527,1.211 4.527,1.727 5.725,2.925 J9.4@7.35,2.925
TPRXP_CON: J9.3 T1.9 | length 17.4
  Bottom w0.254: T1.9@-0.732,-8.955 -0.732,-7.832 0.538,-6.562 0.538,-2.136 4.073,1.399 4.073,2.373 5.895,4.195 J9.3@7.35,4.195
TPTXN_CON: J9.6 T1.16 | length 18.4
  Bottom w0.254: J9.6@7.35,0.405 5.005,0.405 1.9,-2.7 1.9,-5.862 2.511,-6.473 7.273,-6.473 8.158,-7.358 T1.16@8.158,-8.955
TPTXP_CON: J9.5 T1.14 | length 17.4
  Bottom w0.254: T1.14@5.618,-8.955 5.618,-7.518 5.1,-7 2.3,-7 1.446,-6.146 1.446,-2.512 5.633,1.675 J9.5@7.35,1.675
TRX_N: J4.5 R47.2 R48.2 | length 6.5
  Top w0.254: R47.2@-3.319,-2.719 v2@-2.62,-2.719
  Bottom w0.2: R48.2@-6.9,-2.5 -5.7,-2.5 -5.461,-2.739 v2(-2.6,-2.739)
  Bottom w0.254: v2(-2.6,-2.739) J4.5@-1.182,-2.739
TRX_P: J4.6 R48.1 R49.2 | length 6.5
  Top w0.254: R49.2@-3.319,-4 v2(-2.6,-4)
  Bottom w0.254: R48.1@-6.9,-4.1 -5.4,-4.1 -5.3,-4 v2(-2.6,-4) -2.589,-3.989 J4.6@-1.182,-3.989
TXD_DEBUG: J1.3 J6.2 | length 12.6
  Top w0.2: J1.3@24.47,-11.75 v1(26.337,-11.75)
  INT1 w0.2: v1(18.875,-15.458) 19.325,-15.908 21.892,-15.908 26.05,-11.75 v1(26.337,-11.75)
  Bottom w0.2: v1(18.875,-15.458) J6.2@18.875,-14.058
USB_OTG_DN: J1.21
USB_OTG_DP: J1.19
USB_OTG_EN: J2.11 TP4.1 | length 2.6
  Top w0.2: J2.11@-24.57,-9.75 v1(-22,-9.75)
USB_OTG_ID: J1.15 TP3.1 | length 7.2
  Top w0.2: J1.15@24.47,-8.75 26.55,-8.75 27,-9.2 27,-12.4 v1(26.1,-13.3)
VADJ_0: J2.36 J2.38 | length 3.3
  Top w0.2: J2.36@-28.17,-3.75 -26.75,-3.75 -26.75,-3.25 J2.38@-28.17,-3.25
VADJ_1: J2.40 J2.42 | length 3.3
  Top w0.2: J2.40@-28.17,-2.75 -26.75,-2.75 -26.75,-2.25 J2.42@-28.17,-2.25
VADJ_2: J2.50 J2.52 J2.54 | length 5.3
  Top w0.2: J2.50@-28.17,-0.25 -26.75,-0.25 -26.75,0.25 ; J2.52@-28.17,0.25 -26.75,0.25 ; J2.54@-28.17,0.75 -26.75,0.75 -26.75,0.25
WIFI_EN: J1.60
WIFI_WAKE_OUT: J1.52
XTAL_I: C3.2 U1.45 Y1.1 | length 6.6
  Top w0.2: Y1.1@7.75,-4.4 7.75,-5.3 7.95,-5.5 11.593,-5.5 12.243,-6.149 U1.45@13.068,-6.149
XTAL_O: C4.2 U1.46 Y1.3 | length 4
  Top w0.2: Y1.3@9.05,-6.6 9.101,-6.549 U1.46@13.068,-6.549
pads on no net: D1.3 J1.M1 J1.M2 J2.6 J2.12 J2.48 J3.4 J3.34 J10.13 J10.14 RP2.1 U1.33 U1.38 U1.39 U1.40 U1.41 U1.42 U1.43 U1.44 U2.5 U2.6 U2.9 U2.10 U5.7 U7.11 Y2.2 Y2.3

## Polygon pours and split planes (outlines as drawn)
GND on GND "GND" (solid, remove dead copper, pour order 20): -46.72,21.725 -46.72,-22.943 40.664,-22.943 40.664,22.804
+5.0V on INT1 "INT1-5V" (solid, remove dead copper, pour order 19): -6,20.6 -7.3,19.3 -7.3,18.6 -7.3,16 -7.3,15.859 -5.641,14.2 -5.441,14 -2.5,14 16.1,14 19.5,10.6 20.9,9.2 20.9,6.3 20.9,1.6 21.3,1.2 21.5,1 22.4,1 23.452,1 23.652,1.2 23.8,1.348 23.8,1.8 23.8,6.3 23.8,11.527 21.819,13.508 15.827,19.5 13.3,19.5 -7.1,19.5
GND on Bottom "GND" (solid, remove dead copper, pour order 5): -27,13.75 -26,13.75 -22.55,13.75 -22,13.2 -21.1,12.3 -21.1,10.8 -21.1,-7.251 -22,-8.151 -22.599,-8.75 -27,-8.75
GND on Bottom "BT_GND" (solid, remove dead copper, pour order 17): -2.606,-9.879 -2.606,-16.989 10.094,-16.989 10.094,-9.879

## Keep-outs
Top:
  lines w0.2: -29,-19 28.994,-19
Bottom:
  lines w0.2: 29.994,-18 cw(c28.994,-18) 28.994,-19 -29,-19 cw(c-29,-18) -30,-18 -30,18 cw(c-29,18) -29,19 28.994,19 cw(c28.994,18) 29.994,18 ; 30,-18 30,18
Keep-Out Layer:
  lines w0.2: 29.994,-18 cw(c28.994,-18) 28.994,-19 -29,-19 cw(c-29,-18) -30,-18 -30,18 cw(c-29,18) -29,19 28.994,19 cw(c28.994,18) 29.994,18 ; 30,-18 30,18
Assembly Drawing Top:
  lines w0.2: 29.994,-18 cw(c28.994,-18) 28.994,-19 -29,-19 cw(c-29,-18) -30,-18 -30,18 cw(c-29,18) -29,19 28.994,19 cw(c28.994,18) 29.994,18 ; 30,-18 30,18

## Other copper
Top:
  region net GND: 23.95,0.85 23.85,0.75 23.85,-0.65 24,-0.8 26.35,-0.8 26.67,-0.48 26.67,0.58 26.4,0.85
  region net GND: 25.1,5.7 24.972,5.828 22.328,5.828 21.5,5 21.5,4.3 22.622,3.178 24.978,3.178 25.1,3.3
  region: 30.085,4.35
  region net +5.0V: 25.102,2.75 22.15,2.75 22.066,2.666 22.066,1.334 22.2,1.2 25.103,1.2 25.153,1.25 25.153,2.7
INT1:
  pour cut-out: 22.64,5.857 22.313,5.53 22.313,3.487 22.686,3.114 23.441,3.114 23.5,3.173 23.5,5.656 23.299,5.857
GND:
  pour cut-out: 5.481,16.3 5.2,16.019 5.2,14.7 5.8,14.1 9,14.1 9.6,14.7 9.6,15.9 9.2,16.3
  pour cut-out: 22.15,2.75 22.066,2.666 22.066,1.334 22.2,1.2 23.5,1.2 23.6,1.3 23.6,2.6 23.45,2.75
Bottom:
  region net N21825549: -2.55,14.25 -1.75,14.25 -0.9,15.1 -0.45,15.1 -0.45,12.85 -0.75,12.85 -1.8,13.9 -2.5,13.9
  region net GND: -4.35,12.95 -4.7,12.6 -4.7,11.154 -4.33,10.784 -2.616,10.784 -2.4,11 -2.4,12.7 -2.65,12.95
  region net GND: 3.2,4.2 4.9,4.2 5.085,4.385 5.085,4.603 5.582,5.1 6.627,5.1 6.627,5.835 5.367,5.835 4.942,6.26 3.16,6.26 3,6.1 3,4.4
  region net +5.0V: 9.7,15.45 9.7,13.95 9.2,13.45 3.8,13.45 3.8,15.85 9.3,15.85
  pour cut-out: -1.7,11.7 -1.7,18.4 5.5,18.395 5.5,11.962 5.238,11.7
  region net +3.3V: 18.9,10.363 18.237,9.7 16.062,9.7 15.797,9.965 15.797,11.697 16.432,12.332 18.068,12.332 18.9,11.5
  region: -298.997,-274.998
Multi-Layer:
  lines w0.2: 29.994,-18 cw(c28.994,-18) 28.994,-19 -29,-19 cw(c-29,-18) -30,-18 -30,18 cw(c-29,18) -29,19 28.994,19 cw(c28.994,18) 29.994,18 ; 30,-18 30,18

## Silkscreen, mask and mechanical layers (free items; w line width, h text height)
Silkscreen Top:
  lines w0.2: 29.994,-18 cw(c28.994,-18) 28.994,-19 -29,-19 cw(c-29,-18) -30,-18 -30,18 cw(c-29,18) -29,19 28.994,19 cw(c28.994,18) 29.994,18 ; 30,-18 30,18
Silkscreen Bottom:
  text "v0.7" at 25.745,-4.377 h0.5 r270
  text "NaiS6202HD" at 27.1,-12 h1 r270
Outline:
  lines w0.2: 29.994,-18 cw(c28.994,-18) 28.994,-19 -29,-19 cw(c-29,-18) -30,-18 -30,18 cw(c-29,18) -29,19 28.994,19 cw(c28.994,18) 29.994,18 ; 30,-18 30,18